# Altium PCB UI.PcbDoc
Units mil, origin at the board's own origin, x right, y up, seen from the top; angles counter-clockwise.
Board outline 1574.8 x 984.25 mil, 2 copper layers (Top Layer, Bottom Layer); 15 components, 36 nets, 58 pads, 6 vias.
Unrouted connection lines stored in the file: 4.
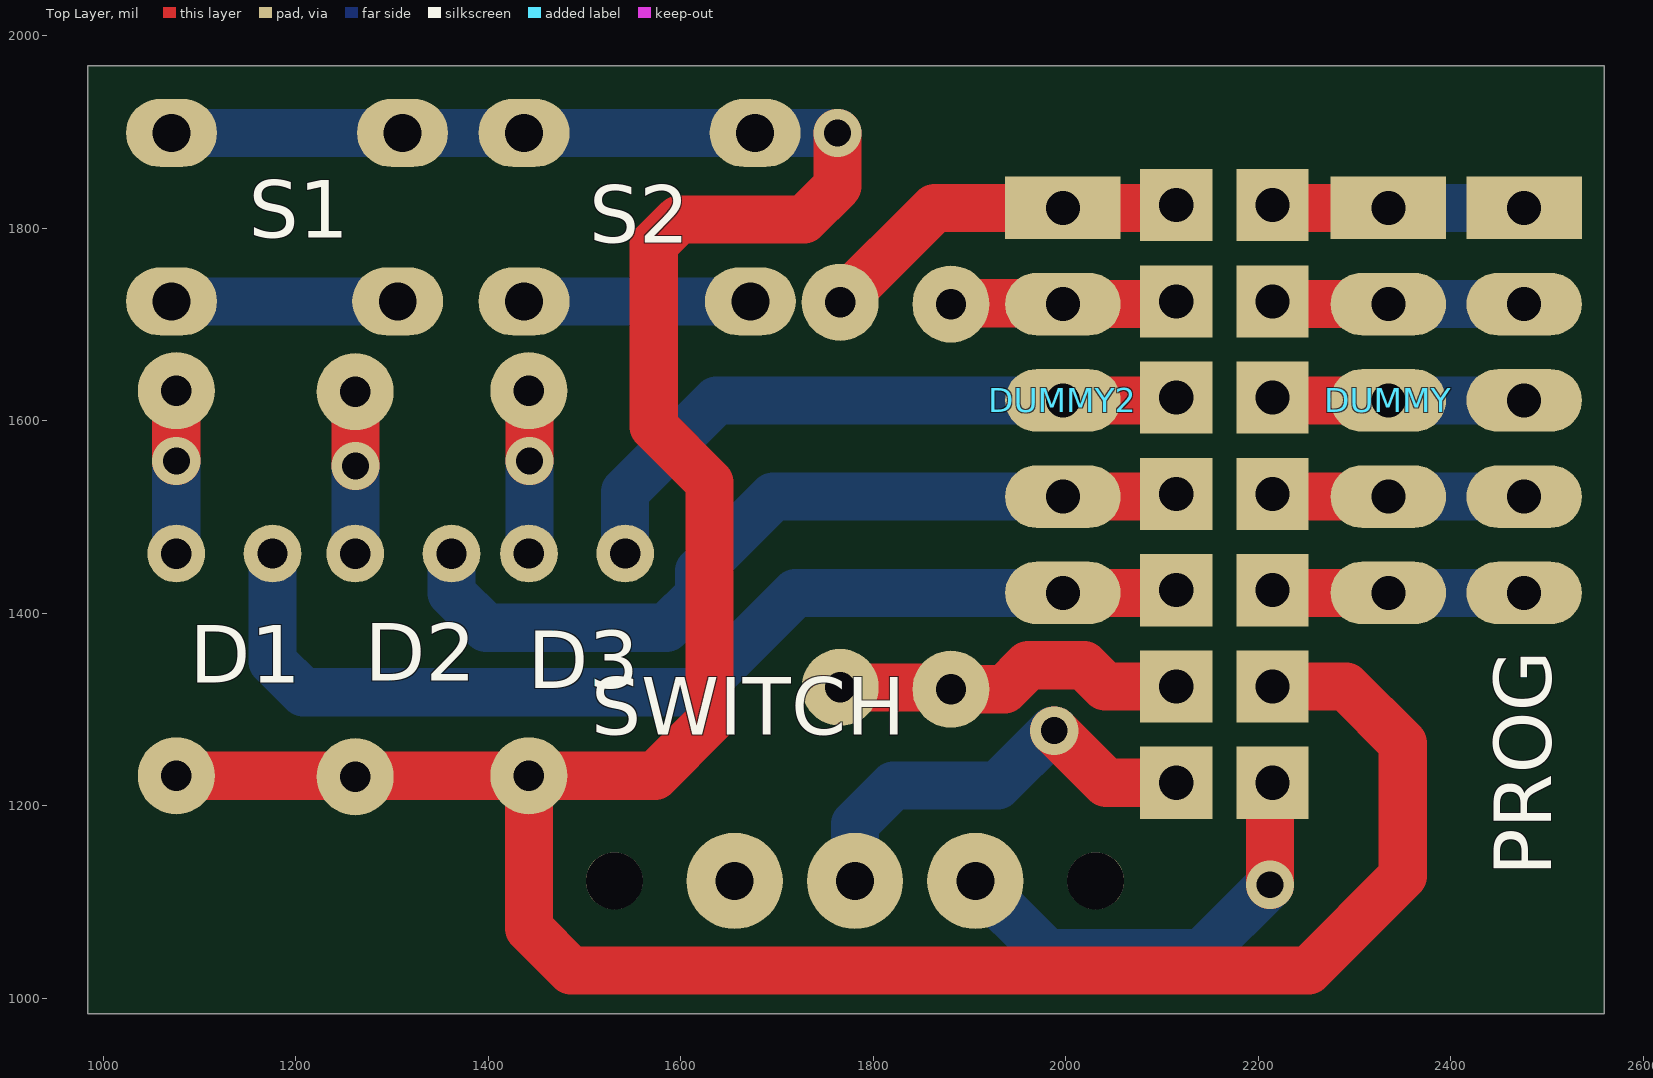
[diagram p0: Top Layer view]
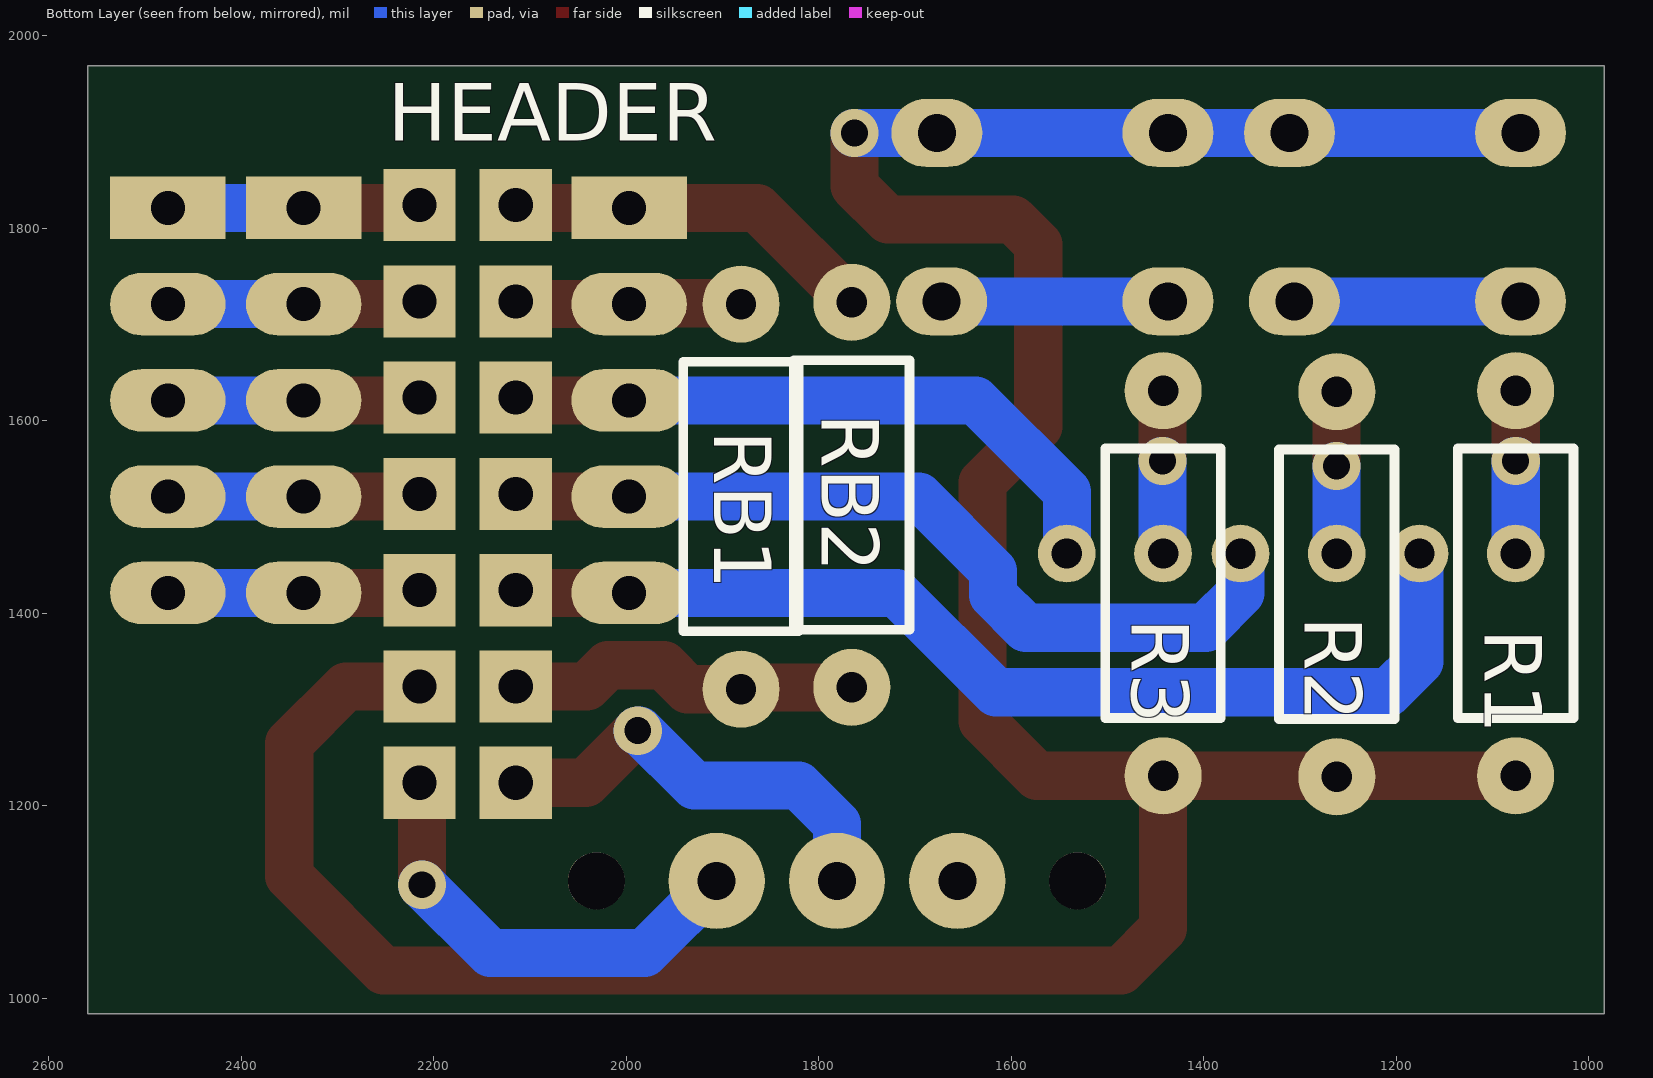
[diagram p1: Bottom Layer view, seen from below]

## Layer stack, top to bottom
Top Solder: solder mask 0.4, Solder Resist, Dk 3.5
Top Layer: signal copper 1.4
Dielectric 1: dielectric 12.6, FR-4, Dk 4.8
Bottom Layer: signal copper 1.4
Bottom Solder: solder mask 0.4, Solder Resist, Dk 3.5

## Board outline
984.25,984.25 2559.06,984.25 2559.06,1968.5 984.25,1968.5

## Design rules (kind name [scope] priority, off if disabled: settings)
Clearance [All] p1: gap=10
ComponentClearance [All] p1: gap=0 collisioncheckmode=3 verticalgap=0 showdistances=FALSE
PolygonConnect [All] p1: connectstyle=Relief reliefconductorwidth=10 reliefentries=4 polygonreliefangle="90 Angle" airgapwidth=10
RoutingVias [All] p1: holewidth=28 width=50 viastyle="Through Hole" minholewidth=28 minwidth=50 maxholewidth=28 maxwidth=50
SolderMaskExpansion [All] p1: expansion=4
Width [All] p1: maxlimit=50 minlimit=10 preferedwidth=30
29 further rules are at their usual default settings.

## Components (designator, comment, footprint, x,y, rotation, side; value= is the part's Value field where it differs from the comment)
D1 "LED" LED-3MM-RED 1126,1462 r180 top
D2 "LED" LED-3MM-YELLOW 1311.83,1461.99 r180 top
D3 "LED" LED-3MM-GREEN 1492.24,1462 r180 top
DUMMY "Header Programmer" "Header 1x5" 2335,1821.14 r0 top
DUMMY2 "Header 1x5" "Header 1x5" 1997,1821.14 r0 top
HEADER "Header 2x7" "HEADER 2x7" 2214.66,1824 r180 bottom
PROG "Header Programmer" "Header 1x5" 2476.11,1821.14 r0 top
R1 "RES" RES-Axial-400mil 1076,1231.19 r90 bottom
R2 "RES" RES-Axial-400mil 1261.83,1230.19 r90 bottom
R3 "RES" RES-Axial-400mil 1442.24,1231.19 r90 bottom
RB1 "RES" RES-Axial-400mil 1880.66,1721.14 r270 bottom
RB2 "RES" RES-Axial-400mil 1765.66,1723 r270 bottom
S1 "BUTTON_SMALL_4PIN" TACT_SWITCH-SMALL-4PIN 1091,1724 r0 top
S2 "BUTTON_SMALL_4PIN" TACT_SWITCH-SMALL-4PIN 1457.24,1724 r0 top
SWITCH "SLIDE-SWITCH" SWITCH 1781,1122 r180 top

## Footprints (in the part's own frame and the unit in brackets; to place one, negate y for a bottom-side part, rotate by r counter-clockwise, add the part's x,y. Pads: shape width x height; smd on the part's side, far side on the other; paste and mask are expansions set on the pad)
"Header 1x5" [mil]
  rect 120x65 hole 35.43: 1(0,0)
  oval 120x65 hole 35.43: 2(0,-100) 3(0,-200) 4(0,-300) 5(0,-400)
  body extent -49,-450 49,50, height 336
"HEADER 2x7" [mm]
  rect 1.905x1.905 hole 0.9: 1(0,0) 2(2.54,0) 3(0,-2.54) 4(2.54,-2.54) 5(0,-5.08) 6(2.54,-5.08) 7(0,-7.62) 8(2.54,-7.62) 9(0,-10.16) 10(2.54,-10.16) 11(0,-12.7) 12(2.54,-12.7) 13(0,-15.24) 14(2.54,-15.24)
  body extent -1.24,-16.51 3.79,1.27, height 8.54
LED-3MM-GREEN [mil]
  round 60 hole 31.5: A(-50,0) K(50,0)
  body extent -66,-65 64,65, height 217
LED-3MM-RED [mil]
  round 60 hole 31.5: A(-50,0) K(50,0)
  body extent -66,-65 64,65, height 217
LED-3MM-YELLOW [mil]
  round 60 hole 31.5: A(-50,0) K(50,0)
  body extent -66,-65 64,65, height 217
RES-Axial-400mil [mil]
  round 80 hole 31.5: 1(0,0) 2(400,0)
  silkscreen extent 60,-60 340,60, body extent -12,-44 410,44, height 94
SWITCH [mm]
  round 2.54 hole 1: 1(-3.175,0) 2(0,0) 3(3.175,0)
  round 1.5 hole 1.5: 4(-6.35,0) 4(6.35,0)
  body extent -7,-3.1 7,3.1, height 9.65
TACT_SWITCH-SMALL-4PIN [mm]
  oval 2.4x1.8 hole 1: 1(-0.508,4.445) 1(5.588,4.445) 2(-0.508,0) 2(5.461,0)
  body extent -1.45,-0.79 6.53,5.21, height 5.15

## Via types
v1: diameter 50, hole 28, Top Layer to Bottom Layer, 6 vias

## Nets (pads, with @x,y where several pads share a name; then routed paths per layer and width w, separated by ;. In a path a pad name is that pad's centre, name@x,y a point inside that pad or via, vN(x,y) a via of type N, cw(c..) or ccw(c..) an arc to the next point about the centre after c; other vN are vias at no path point)
5V: 
7V4: 
11V1: 
38KHZ: 
BAT: HEADER.14 SWITCH.2 | length 455.2
  Top Layer w50: v1(1988,1278) 2042,1224 HEADER.14
  Bottom Layer w50: SWITCH.2 1781,1181 1821,1221 1929,1221 1986,1278 v1(1988,1278)
BTN1: DUMMY2.2 HEADER.4 RB1.1 S1.2 | length 466.7
  Top Layer w50: RB1.1@1880.66,1722 1996.14,1722 DUMMY2.2 HEADER.4@2112,1721.14
  Bottom Layer w50: S1.2@1071,1724 S1.2@1306,1724
BTN2: DUMMY2.1 HEADER.2 RB2.1 S2.2 | length 622
  Top Layer w50: RB2.1 1863.8,1821.14 DUMMY2.1 HEADER.2@2112,1821.14
  Bottom Layer w50: S2.2@1437.24,1724 S2.2@1672.24,1724
CNY1: 
CNY2: 
GND: DUMMY.3 HEADER.5 HEADER.11 PROG.3 R1.1 R2.1 R3.1 S1.1 S2.1 | length 3747.4
  Top Layer w50: R1.1@1076.65,1231.19 R3.1 ; v1(1763,1899) 1763,1844 1728,1809 1598,1809 1572,1783 1572,1594 1630,1536 1630,1288 1573.19,1231.19 R3.1 ; HEADER.5@2212,1621.14 DUMMY.3 ; HEADER.11@2215.66,1325 HEADER.11 2291,1324 2350,1265 2350,1127 2252,1029 1486,1029 1442.24,1072.76 R3.1
  Bottom Layer w50: S1.1@1071,1899 1311,1899 1437.24,1899 1677.24,1899 v1(1763,1899) ; DUMMY.3 PROG.3
IR1: 
IR2: 
IR3: 
IR4: 
IR5: 
IR_SWITCH: 
LED1: D1.A DUMMY2.5 HEADER.10 | length 1121.6
  Top Layer w50: DUMMY2.5@1975,1421.14 DUMMY2.5 HEADER.10@2107.66,1421.14
  Bottom Layer w50: D1.A 1176,1350 1208,1318 1616,1318 1719.14,1421.14 DUMMY2.5
LED2: D2.A DUMMY2.4 HEADER.8 | length 899
  Top Layer w50: DUMMY2.4@1975,1521.14 DUMMY2.4 HEADER.8@2112,1521.14
  Bottom Layer w50: D2.A 1361.83,1421.17 1398,1385 1585,1385 1619.04,1419.04 1619.04,1444.04 1696.14,1521.14 DUMMY2.4
LED3: D3.A DUMMY2.3 HEADER.6 | length 695.3
  Top Layer w50: DUMMY2.3@1975,1621.14 DUMMY2.3 HEADER.6@2112,1621.14
  Bottom Layer w50: D3.A 1542.25,1526.25 1637.14,1621.14 DUMMY2.3
MCLR: DUMMY.1 HEADER.1 PROG.1 | length 264.1
  Top Layer w50: HEADER.1@2212,1821.14 DUMMY.1
  Bottom Layer w50: DUMMY.1 PROG.1
Net7805_1: 
NetC_IR1_1: 
NetC_IR2_1: 
NetC_IR3_1: 
NetC_IR4_1: 
NetC_IR5_1: 
NetD1_K: D1.K R1.2 | length 169.5
  Top Layer w50: v1(1076,1558) R1.2@1076,1630.54
  Bottom Layer w50: D1.K v1(1076,1558) ; R1.2@1076,1630.54 R1.2@1076.65,1631.19
NetD2_K: D2.K R2.2 | length 164.5
  Top Layer w50: v1(1262,1553) R2.2@1262,1625.54
  Bottom Layer w50: D2.K 1262,1462.17 v1(1262,1553) ; R2.2@1262,1625.54 R2.2@1262.65,1626.19
NetD3_K: D3.K R3.2 | length 169.8
  Top Layer w50: v1(1443,1558) R3.2@1443,1630.54
  Bottom Layer w50: D3.K 1443,1462.76 v1(1443,1558) ; R3.2@1443,1630.54 R3.2@1443.65,1631.19
NetD_ERROR_K: 
PGC: DUMMY.5 HEADER.9 PROG.5 | length 264.1
  Top Layer w50: HEADER.9@2212,1421.14 DUMMY.5
  Bottom Layer w50: DUMMY.5 PROG.5
PGD: DUMMY.4 HEADER.7 PROG.4 | length 264.1
  Top Layer w50: HEADER.7@2212,1521.14 DUMMY.4
  Bottom Layer w50: DUMMY.4 PROG.4
V_SWITCH: HEADER.13 SWITCH.1 | length 473.6
  Top Layer w50: v1(2212,1118) 2212,1221.34 HEADER.13
  Bottom Layer w50: SWITCH.1 1981,1047 2141,1047 v1(2212,1118)
VCC: DUMMY.2 HEADER.3 HEADER.12 PROG.2 RB1.2 RB2.2 | length 633.3
  Top Layer w50: RB2.2 1878.8,1323 RB1.2 1936.14,1321.14 1961,1346 2019,1346 2041,1324 HEADER.12 ; HEADER.3@2212,1721.14 DUMMY.2
  Bottom Layer w50: DUMMY.2 PROG.2
XTAL1: 
XTAL2: 
pads on no net: SWITCH.3 SWITCH.4

## Silkscreen, mask and mechanical layers (free items; w line width, h text height)
Mechanical 1:
  the board outline again, w20